# Altium PCB NetworkModule.PcbDoc (part 3 of 3)
Units mm, origin at the board's own origin, x right, y up, seen from the top; angles counter-clockwise.
Board outline 20 x 35 mm, 6 copper layers (Top, GND, Inner3, Inner4, PWR, Bottom), stack 0.74 mm thick; 111 components, 126 nets, 545 pads, 464 vias.
Unrouted connection lines stored in the file: 214.
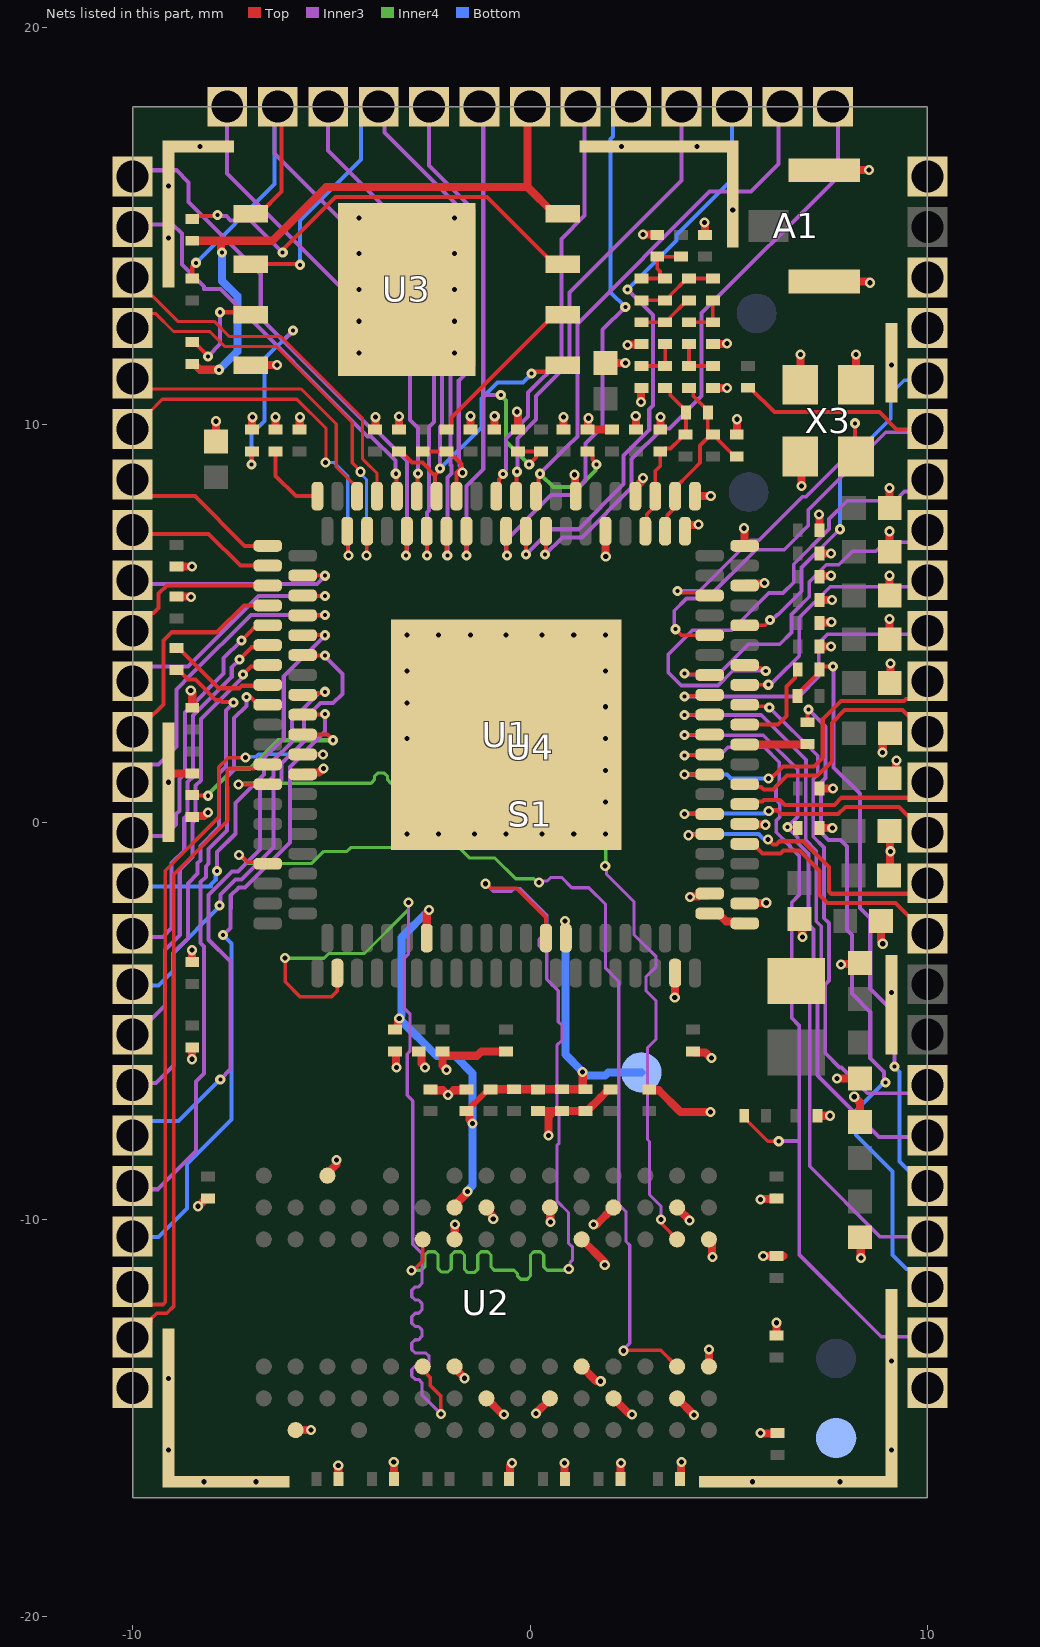
[diagram p7: the nets of this part, all layers, seen from the top]

## Via types
v1: diameter 0.254, hole 0.127, Top to Bottom, tented both sides, 398 vias
v2: diameter 0.254, hole 0.102, Top to Bottom, tented both sides, 66 vias

## Nets (pads, with @x,y where several pads share a name; then routed paths per layer and width w, separated by ;. In a path a pad name is that pad's centre, name@x,y a point inside that pad or via, vN(x,y) a via of type N, cw(c..) or ccw(c..) an arc to the next point about the centre after c; other vN are vias at no path point) (continued)
DDR_RAS: U1.81 U2.K7 | length 22.7
  Top w0.092: v1(-6.162,-3.418) -6.162,-4.021 -5.783,-4.4 -5,-4.4 -4.85,-4.25 U1.81@-4.85,-3.8 ; U2.K7@-2.7,-13.7 -2.7,-13.785 -2.509,-13.976 -2.509,-14.178 -2.251,-14.437 -2.251,-14.883 v1(-2.241,-14.892)
  Inner3 w0.079: v1(-3.062,-2.022) -3.062,-3.323 -3.166,-3.427 -3.166,-4.682 -3.023,-4.825 -3.023,-5.769 -3.09,-5.836 -3.09,-6.877 -2.952,-7.015 -2.952,-10.628 -2.715,-10.864 -2.715,-11.395 -2.721,-11.401 -2.721,-11.506 -2.721,-11.613 -2.805,-11.696 -2.892,-11.696 -2.975,-11.779 -2.975,-11.945 -2.892,-12.029 -2.805,-12.029 -2.721,-12.112 -2.721,-12.278 -2.805,-12.361 -2.892,-12.361 -2.975,-12.445 -2.975,-12.611 -2.892,-12.694 -2.805,-12.694 -2.721,-12.777 -2.721,-12.944 -2.805,-13.027 -2.892,-13.027 -2.975,-13.11 -2.975,-13.276 -2.892,-13.36 -2.622,-13.36 -2.539,-13.443 -2.539,-13.609 -2.622,-13.692 -2.892,-13.692 -2.975,-13.776 -2.975,-13.942 -2.892,-14.025 -2.805,-14.025 -2.721,-14.108 -2.721,-14.148 -2.721,-14.414 -2.243,-14.892 v1(-2.241,-14.892)
  Inner4 w0.078: v1(-6.162,-3.418) -6.151,-3.429 -5.183,-3.429 -5.062,-3.308 -4.164,-3.308 -3.062,-2.206 v1(-3.062,-2.022)
DDR_UDM: U1.64 U2.B3 | length 22.9
  Top w0.092: v1(-7.34,0.94) -7.335,0.945 -6.605,0.945 U1.64@-6.6,0.95 ; v1(3.292,-9.999) 3.323,-10.03 3.323,-10.123 U2.B3@3.7,-10.5
  Inner3 w0.079: v1(1.891,-1.109) 1.925,-1.142 1.925,-1.313 2.611,-1.999 2.611,-2.829 3.172,-3.391 3.172,-3.639 2.918,-3.893 2.918,-4.249 3.172,-4.503 3.172,-5.459 2.955,-5.676 2.955,-7.988 3.005,-8.038 3.005,-9.376 3.292,-9.663 v1(3.292,-9.999)
  Inner4 w0.078: v1(-7.34,0.94) -7.307,0.973 -7.21,0.973 -7.207,0.976 -4.039,0.976 -3.999,0.976 -3.916,1.059 -3.916,1.147 -3.833,1.23 -3.667,1.23 -3.584,1.147 -3.584,1.059 -3.501,0.976 -3.335,0.976 -3.252,1.059 -3.252,1.147 -3.168,1.23 -3.002,1.23 -2.919,1.147 -2.919,1.059 -2.836,0.976 -2.67,0.976 -2.587,1.059 -2.587,1.147 -2.504,1.23 -2.337,1.23 -2.254,1.147 -2.254,1.059 -2.171,0.976 -2.005,0.976 -1.922,1.059 -1.922,1.147 -1.839,1.23 -1.673,1.23 -1.59,1.147 -1.59,1.059 -1.506,0.976 -1.092,0.976 0.218,0.976 1.905,-0.711 1.905,-1.095 v1(1.891,-1.109)
DDR_UDQS: U1.72 U2.B7 | length 24.1
  Top w0.092: v1(-7.325,-0.828) -7.281,-0.828 -7.098,-1.011 -6.639,-1.011 U1.72@-6.6,-1.05 ; v1(2.348,-13.304) 2.36,-13.292 3.292,-13.292 U2.B7@3.7,-13.7
  Inner3 w0.079: v1(0.23,-1.517) 0.263,-1.484 0.43,-1.484 0.518,-1.396 0.796,-1.396 1.054,-1.654 1.481,-1.654 1.902,-2.075 1.902,-3.682 2.234,-4.013 2.234,-9.625 2.414,-9.805 2.414,-10.557 2.508,-10.651 2.508,-13.117 2.348,-13.277 v1(2.348,-13.304)
  Inner4 w0.078: v1(-7.325,-0.828) -7.314,-0.828 -7.101,-1.041 -5.489,-1.041 -5.186,-0.739 -4.604,-0.739 -4.51,-0.645 -1.783,-0.645 -1.52,-0.908 -0.88,-0.908 -0.359,-1.429 0.094,-1.429 0.182,-1.517 v1(0.23,-1.517)
DDR_VREF: C4.1 C5.1 C11.2 C12.1 C13.1 pad.6 R1.1 R2.2 U1.90 U1.104 U2.J2 | length 20.1
  Top w0.152: C4.1@-1.55,-7.275 -1.501,-7.226 -1.501,-7.178 -1.247,-6.924 -1.247,-6.922 -1.031,-6.706 C11.2@-0.965,-6.706
  Top w0.203: C12.1@-3.398,-5.21 -3.391,-5.202 -3.327,-5.202 -3.327,-4.992 -3.291,-4.956 v1(-3.291,-4.942) ; U1.90@-2.6,-2.92 -2.6,-2.287 -2.538,-2.224 v1(-2.538,-2.211) ; U2.J2@-1.9,-9.7 -1.9,-9.645 -1.588,-9.333 -1.588,-9.303 v1(-1.578,-9.293) ; C4.1@-1.6,-7.275 -1.55,-7.275 -1.527,-7.298 -1.527,-7.492 -1.445,-7.574 v1(-1.445,-7.587) ; C11.2@-1,-6.725 R1.1@-0.4,-6.725 R2.2@0.2,-6.725 C13.1@0.8,-6.725 1.327,-6.725 1.327,-6.319 1.315,-6.307 v1(1.315,-6.293) ; v1(0.881,-2.489) 0.891,-2.498 0.891,-2.911 U1.104@0.9,-2.92
  Bottom w0.203: v1@-3.291,-4.929 -3.266,-4.903 -3.266,-4.883 -3.235,-4.852 -3.235,-2.908 v1@-2.547,-2.22 ; v1@-3.28,-4.953 -2.341,-5.893 -1.88,-5.893 -1.445,-6.327 -1.445,-9.149 -1.578,-9.282 v1(-1.578,-9.293) ; v1(0.881,-2.489) 0.889,-2.496 0.889,-5.854 1.315,-6.28 v1(1.315,-6.293) 1.329,-6.293 1.413,-6.377 1.891,-6.377 1.968,-6.3 pad.6@2.8,-6.3
DDR_WE: U1.102 U2.K3 | length 22.3
  Top w0.092: v1(-2.983,-11.283) -2.94,-11.283 -2.807,-11.15 ; -2.806,-11.15 -2.702,-11.047 -2.702,-10.526 U2.K3@-2.692,-10.516 ; v1(-1.122,-1.554) -1.099,-1.554 -0.983,-1.67 -0.335,-1.67 0.4,-2.405 U1.102@0.4,-2.92
  Inner3 w0.079: v1(-1.122,-1.554) -1.113,-1.554 -0.926,-1.741 -0.469,-1.741 -0.407,-1.678 -0.244,-1.678 0.422,-2.344 0.422,-2.413 0.422,-2.785 0.339,-2.868 0.309,-2.868 0.226,-2.952 0.226,-3.118 0.309,-3.201 0.339,-3.201 0.422,-3.284 0.422,-3.683 0.422,-3.953 0.711,-4.242 0.711,-4.512 0.711,-5.026 0.804,-5.119 0.804,-5.491 0.676,-5.619 0.676,-7.201 0.73,-7.255 0.73,-8.083 0.676,-8.137 0.676,-9.532 0.968,-9.824 0.968,-10.599 1.07,-10.701 1.07,-11.017 1.008,-11.08 1.008,-11.216 v1(0.974,-11.249)
  Inner4 w0.078: v1(-2.983,-11.283) -2.978,-11.278 -2.769,-11.278 -2.729,-11.278 -2.646,-11.195 -2.646,-10.897 -2.563,-10.813 -2.397,-10.813 -2.314,-10.897 -2.314,-11.238 -2.231,-11.321 -2.065,-11.321 -1.982,-11.238 -1.982,-10.897 -1.898,-10.813 -1.732,-10.813 -1.649,-10.897 -1.649,-11.256 -1.566,-11.339 -1.4,-11.339 -1.317,-11.256 -1.317,-10.897 -1.234,-10.813 -1.067,-10.813 -0.984,-10.897 -0.984,-11.195 -0.901,-11.278 -0.403,-11.278 -0.32,-11.361 -0.32,-11.421 -0.236,-11.504 -0.07,-11.504 0.013,-11.421 0.013,-10.897 0.096,-10.813 0.262,-10.813 0.345,-10.897 0.345,-11.195 0.428,-11.278 0.508,-11.278 0.945,-11.278 v1(0.974,-11.249)
EPHY_VRT: R23.1 U1.39 | length 1.9
  Top w0.102: R23.1@-6.4,9.325 -6.4,8.711 -5.889,8.2 U1.39@-5.35,8.2
ETH_RN: U1.34 U4.B4 | length 10.5
  Top w0.079: U4.B4@-9.677,12.802 -9.674,12.798 -9.428,12.798 -8.971,12.341 -8.055,12.341 -7.674,11.96 -6.38,11.96 -4.473,10.053 -4.473,9.035 -4.267,8.829 v1(-4.267,8.814) ; v1(-4.115,6.706) -4.107,6.713 -4.107,7.313 U1.34@-4.1,7.32
  Bottom w0.079: v1(-4.267,8.814) -4.267,8.771 -4.115,8.619 v1(-4.115,6.706)
ETH_RP: U1.33 U4.B3 | length 8.8
  Top w0.079: U4.B3@-9.631,13.331 -9.54,13.24 -9.506,13.24 -8.864,12.598 -7.948,12.598 -7.567,12.217 -6.274,12.217 -4.216,10.16 -4.216,9.142 -4.157,9.082 -3.85,8.776 U1.33@-3.85,8.2
ETH_TN: U1.36 U4.B6 | length 9.1
  Top w0.079: U4.B6@-9.601,10.289 -9.251,10.639 -5.866,10.639 -5.134,9.907 -5.134,9.054 v1(-5.145,9.042) ; U1.36@-4.6,7.32 -4.586,7.306 -4.586,6.72 v1(-4.572,6.706)
  Bottom w0.079: v1(-5.145,9.042) -4.922,9.042 -4.586,8.706 -4.586,6.72 v1(-4.572,6.706)
ETH_TP: U1.35 U4.B5 | length 7.2
  Top w0.079: U4.B5@-9.665,10.79 -9.559,10.896 -9.428,10.896 -5.759,10.896 -4.877,10.014 -4.877,8.937 -4.35,8.41 U1.35@-4.35,8.2
GND: A1.2 A1.3 C1.2 C2.2 C3.2 C4.2 C5.2 C6.2 C7.2 C8.2 C9.2 C10.2 C12.2 C13.2 C14.2 C15.2 C16.2 C17.2 C18.2 C19.2 C20.2 C21.2 C22.2 C23.2 C24.2 C25.2 C26.2 C27.2 C28.2 C29.2 C30.2 C31.2 C32.2 C33.2 C34.2 C35.2 C36.2 C37.2 C38.2 C39.2 C40.2 C41.2 C42.2 C43.2 C44.2 C45.2 C46.2 C47.2 C48.2 C49.2 C50.2 C51.1 C52.2 C54.2 C55.2 C58.2 C61.2 C62.2 C63.1 C64.2 C65.2 C66.2 C67.2 C68.2 C69.2 C70.2 C71.2 C72.2 C73.2 L5.2 pad.2 R2.1 R8.1 R15.1 R17.1 R18.1 R19.1 R23.2 R24.2 S1.1 S1.2 S1.3 S1.4 S1.5 S1.6 S1.7 S1.8 S1.9 S1.10 S1.11 U1.1 U1.2 U1.7 U1.10 U1.13 U1.63 U1.115 U1.120 U1.121 U1.128 U1.152 U1.156 U1.157 U2.A3 U2.A7 U2.B2 U2.B8 U2.D2 U2.D8 U2.E3 U2.E7 U2.F2 U2.F8 U2.H2 U2.H8 U2.J3 U2.J7 U2.N1 U2.P9 U3.4 U3.9 U4.B25 U4.C1 U4.C3 U4.C4 U4.C25 X3.1 X3.2 X3.4 | length 56.1
  Top w0.203: v1(-9.1,1) -9.1,1.177 -9.052,1.225 C34.2@-8.5,1.225 ; C14.2@-8.9,5.675 -8.895,5.67 -8.54,5.67 v1(-8.534,5.664) ; C16.2@-8.9,6.425 v1(-8.509,6.426) ; v1(-8.537,3.305) -8.537,3.291 -8.5,3.254 C23.2@-8.5,2.875 ; v1(-8.509,-5.969) -8.505,-5.965 -8.505,-5.679 C3.2@-8.5,-5.675 ; v1(-8.509,-3.226) -8.505,-3.23 -8.505,-3.521 C1.2@-8.5,-3.525 ; R24.2@-8.5,0.125 -8.477,0.148 -8.208,0.148 -8.116,0.24 v1(-8.103,0.24) ; v1(-8.354,-9.668) -8.343,-9.668 -8.15,-9.475 C9.2@-8.1,-9.475 ; C35.2@-7.899,9.576 v1@-7.899,10.058 ; U3.4@-7.024,11.495 v1(-6.364,11.495) ; R17.1@-7,9.875 -6.993,9.883 -6.993,10.178 v1(-6.985,10.185) ; R23.2@-6.4,9.875 v1(-6.401,10.185) ; U2.P9@-5.9,-15.3 v1(-5.514,-15.3) ; v1(-5.791,10.185) -5.796,10.181 -5.796,9.898 C17.2@-5.782,9.885 ; U1.63@-5.72,1.2 -5.674,1.246 -5.309,1.246 -5.213,1.342 v1(-5.2,1.342) ; U2.N1@-5.1,-8.9 -5.1,-8.845 -4.875,-8.62 -4.875,-8.516 v1(-4.865,-8.507) ; C70.2@-4.825,-16.486 v1(-4.825,-16.193) ; C15.2@-3.893,9.875 -3.893,10.178 v1(-3.886,10.185) ; v1(-3.429,-16.104) -3.427,-16.106 C67.2@-3.427,-16.598 ; C12.2@-3.4,-5.775 -3.391,-5.775 -3.368,-5.798 -3.368,-6.162 v1(-3.358,-6.172) ; R18.1@-3.3,9.875 v1(-3.3,10.2) ; C22.2@-2.8,-5.775 -2.75,-5.775 -2.727,-5.798 -2.727,-6.073 -2.642,-6.158 v1(-2.642,-6.172) ; C73.2@-2.5,-6.725 -2.477,-6.748 -2.194,-6.748 -2.083,-6.859 -2.059,-6.859 v1@-2.057,-6.858 ; C20.2@-2.2,-5.8 -2.118,-5.882 -1.331,-5.882 -1.224,-5.775 C10.2@-0.6,-5.775 ; C20.2@-2.2,-5.775 -2.2,-5.793 -2.205,-5.798 -2.205,-6.124 -2.098,-6.231 v1(-2.098,-6.234) ; v1(-2.06,-6.869) -2.046,-6.869 -1.925,-6.748 -1.623,-6.748 C4.2@-1.6,-6.725 ; U2.J7@-1.9,-13.7 -1.9,-13.733 -1.651,-13.982 v1(-1.651,-13.995) ; U2.J3@-1.9,-10.5 -1.895,-10.495 -1.895,-10.137 v1(-1.889,-10.132) ; C19.2@-1.499,9.876 v1@-1.499,10.199 ; U2.H8@-1.1,-14.5 -0.7,-14.9 -0.67,-14.9 v1(-0.66,-14.91) ; U2.H2@-1.1,-9.7 -1.1,-9.755 -0.936,-9.919 -0.936,-9.98 v1(-0.926,-9.99) ; C24.2@-0.9,9.875 -0.894,9.881 -0.894,10.194 v1@-0.9,10.2 ; v1@-0.894,10.205 v1(-0.889,10.211) ; C69.2@-0.516,-16.591 -0.502,-16.577 -0.502,-16.187 -0.457,-16.143 v1(-0.457,-16.129) ; v1(-0.33,10.323) -0.33,10.31 -0.302,10.282 -0.302,9.898 -0.3,9.896 R19.1@-0.3,9.875 ; v1(0.152,-14.884) 0.152,-14.871 0.5,-14.523 U2.F8@0.5,-14.5 ; R2.1@0.25,-7.275 0.594,-7.275 ; v1(0.462,-7.893) 0.462,-7.406 0.594,-7.275 ; U2.F2@0.5,-9.7 0.508,-9.708 0.508,-10.055 v1(0.515,-10.062) ; C43.2@0.838,9.876 v1(0.838,10.185) ; v1(0.864,-16.129) 0.869,-16.135 0.869,-16.58 C68.2@0.882,-16.593 ; v1(1.118,8.738) 1.127,8.728 1.127,8.223 U1.13@1.15,8.2 ; U2.E7@1.3,-13.7 1.662,-14.062 1.768,-14.062 v1(1.778,-14.072) ; U2.E3@1.3,-10.5 1.87,-11.07 1.87,-11.141 v1(1.879,-11.151) ; C5.2@1.4,-7.3 1.412,-7.3 C5.2@1.437,-7.275 ; R15.1@1.405,9.876 C46.2@2.057,9.876 ; R15.1@1.44,9.876 1.463,9.9 1.463,10.15 v1(1.473,10.16) ; C5.2@1.441,-7.275 C5.2@1.437,-7.275 ; v1(1.597,-10.132) 1.606,-10.122 1.678,-10.122 U2.D2@2.1,-9.7 ; U1.10@1.9,7.32 1.903,7.318 1.903,6.683 v1(1.905,6.68) ; C42.2@1.9,11.55 1.902,11.552 2.395,11.552 v1(2.396,11.553) ; C65.2@2.027,-6.725 1.977,-6.725 1.778,-6.924 1.778,-6.934 C5.2@1.437,-7.275 ; U2.D8@2.1,-14.5 2.5,-14.9 2.556,-14.9 v1(2.565,-14.91) ; C8.2@2.281,-16.595 2.281,-16.134 v1(2.286,-16.129) ; v1(2.453,12) 2.453,12.02 2.795,12.02 L5.2@2.8,12.025 ; U1.7@2.65,8.2 2.65,8.412 2.827,8.589 2.827,8.648 v1(2.837,8.657) ; v1@2.659,10.237 2.667,10.23 C47.2@2.667,9.876 ; v1(2.794,10.566) 2.797,10.569 2.797,10.922 C55.2@2.8,10.925 ; v1(2.845,14.783) 2.849,14.779 3.196,14.779 C61.2@3.2,14.775 ; C72.2@3,-6.725 3.023,-6.748 3.239,-6.748 3.788,-7.297 v1(4.542,-7.297) ; C51.1@3.277,9.876 3.278,9.877 3.278,10.186 v1(3.279,10.187) ; v1(3.641,-4.42) 3.646,-4.415 3.646,-3.804 U1.115@3.65,-3.8 ; U2.B8@3.7,-14.5 3.703,-14.5 4.122,-14.919 v1(4.125,-14.919) ; U2.B2@3.734,-9.728 3.734,-9.743 4.009,-10.018 v1(4.009,-10.027) ; C7.2@3.78,-16.595 3.798,-16.577 3.798,-16.129 3.81,-16.117 v1(3.81,-16.104) ; U1.2@3.9,7.32 3.9,7.425 3.948,7.474 4.231,7.474 v1(4.241,7.483) ; v1(4.023,-1.884) 4.032,-1.874 4.234,-1.874 4.262,-1.846 4.474,-1.846 U1.121@4.52,-1.8 ; C64.2@4.1,-5.775 4.123,-5.798 4.413,-5.798 4.553,-5.939 v1(4.567,-5.939) ; U1.1@4.15,8.2 4.152,8.202 4.545,8.202 v1(4.547,8.204) ; v1(4.394,15.088) 4.397,15.085 4.397,14.778 C62.2@4.4,14.775 ; U2.A7@4.5,-13.7 v1(4.5,-13.268) ; U2.A3@4.5,-10.5 4.5,-10.555 4.581,-10.636 4.581,-10.94 v1(4.59,-10.95) ; C54.2@4.6,10.925 4.602,10.924 4.952,10.924 v1(4.953,10.922) ; C58.2@4.6,12.025 4.607,12.032 4.946,12.032 v1(4.953,12.04) ; C52.2@5.127,9.773 5.203,9.773 5.203,10.131 v1(5.207,10.135) ; v1(5.385,7.391) 5.392,7.384 5.392,6.958 U1.156@5.4,6.95 ; U1.120@5.4,-2.05 5.409,-2.041 5.935,-2.041 v1(5.944,-2.032) ; U1.128@5.4,-0.05 5.41,-0.06 5.913,-0.06 v1(5.923,-0.07) ; U1.152@5.4,5.95 5.446,5.996 5.867,5.996 5.884,6.013 v1(5.897,6.013) ; v1(5.8,-15.375) 5.81,-15.385 6.21,-15.385 C2.2@6.225,-15.4 ; v1(5.8,-9.5) 5.81,-9.49 6.127,-9.49 6.146,-9.471 C6.2@6.146,-9.452 ; v1(5.867,-10.922) 5.869,-10.923 6.225,-10.923 6.376,-10.923 6.377,-10.925 ; C71.2@6.2,-12.925 v1(6.2,-12.6) ; C26.2@6.66,-2.423 6.848,-2.611 6.848,-2.886 v1(6.858,-2.896) ; X3.1@6.807,11.107 v1(6.807,11.76) ; v1(6.833,8.458) X3.2@6.833,9.067 ; C50.2@7.235,-7.391 v1(7.544,-7.391) ; v1(7.273,7.738) 7.279,7.731 7.279,7.347 C45.2@7.285,7.341 ; C39.2@7.275,6.725 7.306,6.756 v1(7.569,6.756) ; R8.1@7.285,-0.152 v1(7.605,-0.152) ; C63.1@7.286,0.839 v1@7.621,0.839 ; C18.2@7.285,5.004 7.303,5.022 7.57,5.022 v1(7.58,5.031) ; C41.2@7.291,5.576 7.3,5.585 7.595,5.585 v1(7.598,5.581) ; C37.2@7.296,6.172 7.296,6.175 7.309,6.188 7.559,6.188 v1(7.569,6.198) ; C21.2@7.397,4.42 v1(7.569,4.42) ; A1.2@7.4,13.6 7.402,13.598 8.506,13.598 8.535,13.569 v1(8.549,13.569) ; A1.3@7.4,16.4 7.401,16.401 v1(8.533,16.402) v1(8.533,16.402) ; v1(7.722,-6.452) C30.2@8.203,-6.451 ; v1(7.823,-3.581) 7.833,-3.572 8.102,-3.572 8.2,-3.473 C31.2@8.2,-3.468 ; v1(8.157,-6.913) 8.303,-7.058 8.303,-7.447 C49.2@8.2,-7.55 ; C48.2@8.2,-10.45 8.321,-10.572 8.321,-10.963 v1(8.331,-10.973) ; X3.4@8.204,11.104 v1(8.204,11.76) ; C25.2@8.832,-2.389 8.832,-3.006 8.875,-3.049 v1(8.875,-3.063) ; C27.2@8.847,-1.4 C27.2@8.856,-1.409 ; v1(8.865,1.753) 8.874,1.762 8.874,2.056 C32.2@9.053,2.235 ; C28.2@9.039,-0.229 C28.2@9.04,-0.231 ; C27.2@9.042,-1.372 9.058,-1.356 9.058,-0.746 v1(9.068,-0.737) 9.058,-0.727 9.058,-0.315 C28.2@9.093,-0.279 ; v1(9.042,5.105) 9.046,5.102 9.046,4.604 C40.2@9.05,4.6 C40.2@9.05,4.699 ; v1(9.042,6.198) 9.046,6.194 9.046,5.704 C36.2@9.05,5.7 C36.2@9.05,5.842 ; v1(9.042,7.315) 9.046,7.311 9.046,6.669 9.058,6.657 9.05,6.649 C38.2@9.05,6.807 ; v1(9.042,8.407) 9.046,8.404 9.046,7.904 C44.2@9.05,7.9 ; C29.2@9.05,1.1 9.21,1.26 9.21,1.54 v1(9.22,1.549) ; C33.2@9.05,3.5 9.068,3.518 v1@9.068,3.962 ; 0.594,-7.275 0.803,-7.275 C5.2@1.437,-7.275
  other v1: -8.2,-16.6 -6.9,-16.6 5.6,-16.6 7.8,-16.6 -9.1,-15.8 9.1,-15.8 -9.1,-14 9.093,-13.564 9.093,-4.293 -3.1,-0.3 -2.3,-0.3 -1.4,-0.3 -0.6,-0.3 0.3,-0.3 1.1,-0.3 1.9,-0.3 1.9,0.5 7.621,0.84 1.9,1.3 -3.1,2.1 1.9,2.1 1.9,2.9 -3.1,3 -3.1,3.8 1.9,3.8 9.068,3.988 -3.1,4.7 -2.3,4.7 -1.5,4.7 -0.6,4.7 0.3,4.7 1.1,4.7 1.9,4.7 -7.899,10.084 -1.499,10.211 2.659,10.212 9.1,11.5 -4.3,11.8 -1.9,11.8 -4.3,12.6 -1.9,12.6 -4.3,13.4 -1.9,13.4 -4.3,14.3 -1.9,14.3 -9.1,14.7 -4.3,15.2 -1.9,15.2 5.1,15.4 -9.1,16 -8.3,17 2.3,17 4.2,17
I2C_SCL: U1.20 U4.A5 | length 13.2
  Top w0.102: U1.20@-0.6,7.32 -0.592,7.312 -0.592,6.713 v2(-0.584,6.706)
  Inner3 w0.102: v2(-0.584,6.706) -0.61,6.731 -0.61,7.087 0.533,8.23 1.03,8.23 1.372,8.571 1.372,8.592 1.397,8.618 1.397,9.525 1.829,9.957 1.829,12.386 v2(2.396,12.954)
  Bottom w0.102: U4.A5@2.091,17.551 2.091,17.253 2.021,17.182 2.021,13.33 v2(2.396,12.954)
I2C_SDA: U1.21 U4.A6 | length 10.5
  Top w0.102: U1.21@-0.85,8.2 -0.784,8.266 -0.784,8.615 -0.678,8.722 v2(-0.678,8.756)
  Inner3 w0.102: v2(-0.678,8.756) -0.678,8.798 -0.605,8.87 -0.605,9.653 -0.051,10.208 -0.051,10.803 0.787,11.641 0.787,14.675 1.372,15.259 U4.A6@1.372,17.78
I2S_CLK: U1.19 U4.A4 | length 11.3
  Top w0.102: U1.19@-0.35,8.2 -0.338,8.212 -0.338,8.802 v2(-0.326,8.814)
  Inner3 w0.102: v2(-0.326,8.814) -0.318,8.821 -0.318,9.653 0.152,10.124 0.152,10.719 0.991,11.557 0.991,13.324 3.81,16.143 U4.A4@3.81,17.755
I2S_SDI: U1.16 U4.A1 | length 15.1
  Top w0.102: v2(0.381,6.731) 0.4,6.75 U1.16@0.4,7.32
  Inner3 w0.102: v2(0.381,6.731) 0.813,7.163 1.303,7.163 2.558,8.417 2.558,9.134 3.331,9.907 3.506,9.907 4.318,10.719 4.318,12.804 7.747,16.233 U4.A1@7.747,17.755
I2S_SDO: R15.2 U1.17 U4.A2 | length 14.8
  Top w0.102: U1.17@0.15,8.2 0.216,8.266 0.216,8.684 0.254,8.722 v2(0.254,8.763) ; R15.2@1.448,9.326 1.498,9.326 1.572,9.252 1.572,9.127 1.676,9.023 v2(1.676,8.992)
  Inner3 w0.102: v2(0.254,8.763) 0.923,9.432 1.194,9.703 1.194,12.536 4.519,15.862 5.558,15.862 6.256,16.56 U4.A2@6.256,17.599
  Inner4 w0.102: v2@0.279,8.738 0.584,8.433 1.233,8.433 1.647,8.847 1.647,8.962 v2(1.676,8.992)
I2S_WS: U1.18 U4.A3 | length 14.6
  Top w0.102: v2(-0.102,6.731) -0.1,6.733 U1.18@-0.1,7.32
  Inner3 w0.102: v2(-0.102,6.731) 0.533,7.366 1.219,7.366 2.355,8.501 2.355,9.218 2.999,9.863 2.999,10.376 3.099,10.476 3.099,12.754 v2(2.452,13.4)
  Bottom w0.102: v2(2.452,13.4) 3.683,14.631 3.683,14.772 5.08,16.169 U4.A3@5.08,17.678
IO11: U1.29 U4.A13 | length 11.6
  Top w0.102: U1.29@-2.85,8.2 -2.835,8.215 -2.835,8.753 v2(-2.819,8.768)
  Inner3 w0.102: U4.A13@-7.62,17.755 -7.62,16.315 -3.021,11.716 -3.021,10.118 -2.819,9.917 v2(-2.819,8.768)
IO14: U1.40 U4.B7 | length 3.8
  Top w0.102: U4.B7@-9.779,8.428 -9.551,8.2 -8.429,8.2 -7.179,6.95 U1.40@-6.6,6.95
IO15: U1.42 U4.B8 | length 3.5
  Top w0.102: U4.B8@-9.792,7.252 -8.091,7.252 -7.288,6.45 U1.42@-6.6,6.45
IO16: U1.43 U4.B9 | length 5.2
  Top w0.102: U1.43@-5.72,6.2 -5.159,6.2 v2(-5.156,6.198)
  Inner3 w0.102: U4.B9@-9.703,5.994 -5.359,5.994 v2(-5.156,6.198)
IO17: U1.44 U4.B10 | length 3.7
  Top w0.102: U4.B10@-9.703,5.107 -9.551,5.259 -9.473,5.259 -9.449,5.283 -9.447,5.283 -9.344,5.386 -9.344,5.746 -9.138,5.952 -7.348,5.952 -7.345,5.95 U1.44@-6.6,5.95
IO38: R8.2 U1.137 U4.C22 | length 18.1
  Top w0.092: v2(3.886,2.184) 3.894,2.192 4.512,2.192 U1.137@4.52,2.2 ; v2(6.475,-0.129) v2@6.505,-0.129 ; v2@6.502,-0.127 v2@6.505,-0.129 ; R8.2@6.735,-0.152 R8.2@6.712,-0.129 ; R8.2@6.782,-0.127 6.779,-0.129 R8.2@6.712,-0.129 ; v2@6.505,-0.129 R8.2@6.712,-0.129
  Inner3 w0.092: v2(3.886,2.184) 5.867,2.184 6.739,1.313 6.739,0.14 6.475,-0.125 v2(6.475,-0.129) 6.734,-0.388 6.734,-0.527 7.008,-0.802 7.008,-2.58 7.133,-2.704 7.133,-3.83 7.037,-3.926 7.037,-8.663 8.814,-10.439 9.703,-10.439 U4.C22@9.779,-10.516
IO44: U1.144 U4.C7 | length 12.3
  Top w0.092: U1.144@5.4,3.95 5.468,3.882 5.809,3.882 5.887,3.804 v2(5.931,3.804)
  Inner3 w0.092: v2(5.931,3.804) 5.102,3.804 4.731,3.434 3.805,3.434 3.48,3.759 3.48,4.216 4.089,4.826 5.072,4.826 6.008,5.761 6.367,5.761 6.634,6.029 6.634,6.484 7.523,7.373 7.523,7.625 7.985,8.086 9.186,8.086 9.416,8.316 9.616,8.316 U4.C7@9.8,8.5
JTAG_TCK: U1.140 U4.C19 | length 12.9
  Top w0.092: U1.140@5.4,2.95 5.435,2.915 5.989,2.915 v2(6.02,2.884)
  Inner3 w0.092: v2(6.02,2.884) 7.239,1.665 7.239,1.192 7.127,1.08 7.127,-0.372 7.396,-0.641 7.396,-2.419 7.521,-2.544 7.521,-3.991 7.425,-4.086 7.425,-5.814 7.788,-6.177 7.835,-6.177 8.487,-6.828 9.749,-6.828 U4.C19@9.779,-6.858
JTAG_TDI: U1.142 U4.C9 | length 5.9
  Top w0.092: U1.142@5.4,3.45 5.402,3.452 5.992,3.452 v2(5.994,3.454)
  Inner3 w0.092: v2(5.994,3.454) 6.038,3.454 6.108,3.524 6.115,3.524 6.24,3.649 6.771,4.18 6.771,5.143 7.551,5.923 9.707,5.923 U4.C9@9.728,5.944
JTAG_TDO: U1.143 U4.C8 | length 8.4
  Top w0.092: v2(3.89,3.738) 3.909,3.719 4.501,3.719 U1.143@4.52,3.7
  Inner3 w0.092: v2(3.89,3.738) 3.919,3.708 4.732,3.708 5.499,4.475 6.286,4.475 6.577,4.766 6.577,5.223 7.022,5.668 7.022,6.039 7.455,6.472 7.77,6.472 8.114,6.816 8.7,6.816 8.92,7.036 U4.C8@9.754,7.036
JTAG_TMS: U1.141 U4.C10 | length 7.7
  Top w0.092: v2(3.886,3.159) 3.907,3.179 4.499,3.179 U1.141@4.52,3.2
  Inner3 w0.092: v2(3.886,3.159) 6.766,3.159 7.264,3.658 7.264,4.503 7.485,4.724 9.728,4.724 U4.C10@9.779,4.775
JTAG_TRST: U1.139 U4.C20 | length 15.5
  Top w0.092: v2(3.886,2.692) 3.89,2.696 4.516,2.696 U1.139@4.52,2.7
  Inner3 w0.092: v2(3.886,2.692) 5.817,2.692 6.942,1.567 6.942,1.169 6.933,1.16 6.933,-0.452 7.202,-0.721 7.202,-2.499 7.327,-2.624 7.327,-3.911 7.231,-4.006 7.231,-6.375 8.781,-7.925 U4.C20@9.779,-7.925
LXBK: L1.1 U1.118 U1.119 | length 0.9
  Top w0.203: U1.119@4.52,-2.3 4.732,-2.3 4.936,-2.504 5.298,-2.504 U1.118@5.359,-2.565
PCIE_CKN: U1.132 U4.C12 | length 5.8
  Top w0.104: U1.132@5.415,0.95 5.48,0.885 5.814,0.885 5.881,0.818 6.114,0.818 6.463,1.167 7.237,1.167 7.597,1.526 7.597,2.496 7.917,2.816 9.374,2.816 U4.C12@9.651,2.539
PCIE_CKP: U1.133 U4.C11 | length 7.7
  Top w0.104: v1(3.886,1.194) 3.889,1.197 4.517,1.197 U1.133@4.52,1.2 ; v1(5.997,1.098) 6.038,1.098 6.099,1.159 6.129,1.159 6.367,1.398 7.142,1.398 7.366,1.622 7.366,2.591 7.821,3.046 9.414,3.046 9.459,3.092 U4.C11@9.552,3.092
  Bottom w0.104: v1(3.886,1.194) 4.953,1.194 5.051,1.095 5.994,1.095 v1(5.997,1.098)
PCIE_RXN: U1.130 U4.C13 | length 4.5
  Top w0.104: U1.130@5.4,0.45 5.465,0.515 5.849,0.515 5.891,0.556 6.283,0.556 6.409,0.431 7.658,0.431 7.839,0.612 U4.C13@9.692,0.612
PCIE_RXP: U1.129 U4.C14 | length 6.6
  Top w0.104: v1(3.886,0.203) 3.888,0.202 4.518,0.202 U1.129@4.52,0.2 ; v1(6.007,0.276) 6.026,0.295 6.218,0.295 6.313,0.2 7.754,0.2 7.935,0.381 9.285,0.381 9.552,0.114 U4.C14@9.552,0.098
  Bottom w0.104: v1(3.886,0.203) 3.894,0.211 5.901,0.211 5.966,0.276 v1(6.007,0.276)
PCIE_TXN: U1.126 U4.C16 | length 5.4
  Top w0.104: U1.126@5.4,-0.55 5.61,-0.55 5.854,-0.794 6.3,-0.794 6.379,-0.715 6.775,-0.715 7.288,-1.227 7.288,-1.84 7.484,-2.036 9.196,-2.036 9.552,-2.392 U4.C16@9.552,-2.442
PCIE_TXP: U1.127 U4.C15 | length 7.3
  Top w0.104: v1(3.988,-0.333) 4.004,-0.316 4.504,-0.316 U1.127@4.52,-0.3 ; v1(5.983,-0.442) 5.998,-0.442 6.119,-0.563 6.205,-0.563 6.284,-0.484 6.871,-0.484 7.518,-1.131 7.518,-1.744 7.579,-1.805 U4.C15@9.652,-1.805
  Bottom w0.104: v1(3.988,-0.333) 4.016,-0.305 5.753,-0.305 5.862,-0.414 5.954,-0.414 v1(5.983,-0.442)
PERST_N: R16.1 U1.135 U4.C24 | length 21.7
  Top w0.092: v2(3.886,1.676) 3.898,1.688 4.508,1.688 U1.135@4.52,1.7 ; R16.1@5.389,-7.391 5.389,-7.441 5.98,-8.032 v2(6.257,-8.032)
  Inner3 w0.092: v2(3.886,1.676) 4.775,1.676 4.978,1.88 5.898,1.88 6.272,1.505 6.272,0.984 6.19,0.902 6.19,0.559 6.282,0.467 6.282,0.124 6.198,0.04 6.198,-0.26 6.54,-0.602 6.54,-0.621 6.77,-0.851 6.77,-1.837 6.583,-2.024 6.583,-4.932 6.77,-5.119 6.77,-8.026 6.77,-10.885 8.839,-12.954 U4.C24@9.779,-12.954 ; v2(6.257,-8.032) 6.263,-8.026 6.756,-8.026
PORST_N: R11.2 R13.1 U4.C21 | length 14.7
  Top w0.102: R13.1@6.733,3.225 R11.2@7.262,3.754 ; R11.2@7.309,3.909 7.312,3.912 v2(7.62,3.912)
  Top w0.203: R13.1@6.733,3.175 R13.1@6.733,3.225 ; R11.2@7.285,3.835 7.285,3.885 R11.2@7.309,3.909
  Inner3 w0.102: v2(7.62,3.912) 7.641,3.891 7.641,1.376 8.306,0.711 8.306,-2.165 8.56,-2.419 8.56,-4.191 9.169,-4.801 v2(9.169,-6.147)
  Bottom w0.102: v2@9.169,-6.161 9.297,-6.288 9.297,-8.537 U4.C21@9.551,-8.791
  Bottom w0.203: v2@9.169,-6.161 v2(9.169,-6.147)
PORST_N_1: R11.1 U1.138 | length 2.4
  Top w0.102: U1.138@5.4,2.45 6.235,2.45 6.455,2.671 6.455,3.413 6.661,3.619 6.661,3.761 R11.1@6.735,3.835
PWM0: U1.45 U4.B11 | length 6
  Top w0.102: U1.45@-5.72,5.7 -5.71,5.69 v2(-5.156,5.69)
  Inner3 w0.102: U4.B11@-9.779,3.681 -9.551,3.909 -8.61,3.909 -6.829,5.69 v2(-5.156,5.69)
PWM1: U1.46 U4.B12 | length 5.2
  Top w0.102: U4.B12@-9.652,2.538 -9.227,2.963 -9.227,4.563 -9.015,4.775 -7.874,4.775 -7.199,5.45 U1.46@-6.6,5.45
REF_CLKO: R10.1 U4.C23 | length 16.4
  Top w0.102: R10.1@6.985,2.51 6.985,2.805 v2(7.008,2.827)
  Inner3 w0.102: v2(7.008,2.827) 7.438,2.397 7.438,1.11 7.326,0.998 7.326,-0.268 7.515,-0.457 7.812,-0.457 7.976,-0.621 7.976,-2.718 8.103,-2.845 8.103,-4.318 8.56,-4.775 8.56,-5.932 8.912,-6.284 8.912,-6.524 v2(8.941,-6.553)
  Bottom w0.102: v2(8.941,-6.553) 8.912,-6.553 8.204,-7.261 8.204,-7.881 9.119,-8.795 9.119,-10.899 9.471,-11.251 U4.C23@9.574,-11.251
REF_CLKO_1: R10.2 U1.136 | length 1.6
  Top w0.203: U1.136@5.4,1.95 5.405,1.955 R10.2@6.984,1.955
RF_DIFF+: C56.1 C59.2 L5.1 | length 1.5
  Top w0.092: L5.1@2.794,12.548 2.821,12.575 C56.1@3.353,12.575 ; C56.1@3.353,12.624 3.499,12.624 3.529,12.654 3.529,12.704 3.95,13.125 C59.2@4,13.125
RF_DIFF-: C57.1 C58.1 L4.1 | length 1.2
  Top w0.092: C57.1@4,12.575 C58.1@4.6,12.575 C58.1@4.623,12.598 ; C58.1@4.597,12.598 4.6,12.601 L4.1@4.6,13.125
RF_HP+: C55.1 C56.2 L2.2 | length 1.2
  Top w0.092: C55.1@2.794,11.43 2.839,11.475 L2.2@3.4,11.475 3.4,12.011 C56.2@3.404,12.014
RF_HP-: C54.1 C57.2 L3.2 | length 1.2
  Top w0.092: C57.2@4.013,12.04 4,12.026 C57.2@4,12.025 L3.2@4,11.475 C54.1@4.6,11.475 4.603,11.475 C54.1@4.623,11.455
RF_LP: C60.1 C61.1 L6.2 L7.1 | length 1.9
  Top w0.092: C60.1@2.794,13.64 2.829,13.675 L6.2@3.4,13.675 3.35,13.675 3.271,13.754 3.271,13.854 3.2,13.925 C61.1@3.2,14.225 3.25,14.225 L7.1@3.8,14.225
RF_LP+: C51.2 C53.1 L2.1 R9.1 U1.5 U1.6 | length 4.2
  Top w0.092: U1.6@2.9,7.32 2.936,7.356 2.936,7.744 U1.5@3.15,7.958 ; U1.5@3.15,8.2 3.15,8.832 3.272,8.954 3.272,9.292 C51.2@3.305,9.325 ; C51.2@3.3,9.325 3.374,9.399 3.537,9.399 3.783,9.645 3.783,9.67 3.813,9.7 3.925,9.7 C53.1@3.925,10.3 ; L2.1@3.404,10.922 3.453,10.922 3.529,10.846 3.529,10.746 3.925,10.35 C53.1@3.925,10.3 C53.1@3.937,10.312
RF_LP-: C52.1 C53.2 L3.1 R12.1 U1.3 U1.4 | length 5.3
  Top w0.092: U1.4@3.4,7.32 3.456,7.376 3.456,7.723 3.582,7.85 3.582,8.342 4.092,8.852 4.277,9.037 4.277,9.476 4.529,9.728 4.671,9.728 4.729,9.67 4.729,9.62 5.15,9.199 C52.1@5.2,9.199 ; L3.1@4,10.925 4.027,10.925 4.106,10.846 4.106,10.719 4.475,10.35 C53.2@4.475,10.305 ; C53.2@4.47,10.312 4.47,10.255 C53.2@4.505,10.22 ; R12.1@4.535,9.768 4.475,9.828 4.475,10.19 C53.2@4.547,10.262
RF_NOTCH: C59.1 C60.2 L4.2 L6.1 | length 2.1
  Top w0.092: C60.2@2.794,13.106 2.813,13.125 L6.1@3.4,13.125 ; L6.1@3.404,13.106 3.431,13.106 3.529,13.204 3.529,13.254 3.95,13.675 C59.1@4,13.675 L4.2@4.6,13.675 4.638,13.675 L4.2@4.648,13.665
RXD0: U1.31 U4.B2 | length 10.2
  Top w0.102: v2(-3.378,8.763) -3.364,8.749 -3.364,8.214 U1.31@-3.35,8.2
  Inner3 w0.102: U4.B2@-9.677,15.037 -8.992,15.037 -8.763,14.808 -8.763,14.032 -8.206,13.475 -8.206,13.411 -7.794,13.411 -4.086,9.703 -3.999,9.703 -3.389,9.093 -3.389,8.774 v2(-3.378,8.763)
RXD1: U1.148 U4.C5 | length 8.5
  Top w0.092: U1.148@5.4,4.95 5.915,4.95 6.041,5.076 v2(6.041,5.085)
  Inner3 w0.092: v2(6.041,5.085) 6.085,5.085 6.211,5.212 6.235,5.212 6.828,5.805 6.828,6.404 7.755,7.33 7.833,7.33 v2(7.798,7.366)
  Bottom w0.092: v2(7.798,7.366) 7.798,8.878 9.074,10.154 9.074,10.776 9.416,11.117 U4.C5@9.67,11.117
RXD2: U1.48 U4.B14 | length 7.1
  Top w0.102: v2(-7.264,4.572) -6.952,4.884 -6.666,4.884 U1.48@-6.6,4.95
  Inner3 w0.102: U4.B14@-9.754,-0.356 -9.195,-0.356 -8.904,-0.065 -8.904,0.196 -8.821,0.279 -8.821,1.085 -8.687,1.219 -8.687,2.76 -7.709,3.737 -7.709,4.127 v2(-7.264,4.572)
SD_CD: U1.50 U4.B16 | length 9.1
  Top w0.102: v2(-7.315,4.089) -7.008,4.397 -6.653,4.397 U1.50@-6.6,4.45
  Inner3 w0.102: U4.B16@-9.703,-2.89 -9.24,-2.89 -9.017,-2.667 -9.017,-1.033 -8.701,-0.717 -8.701,0.101 -8.617,0.184 -8.617,1.001 -8.484,1.135 -8.484,2.676 -7.506,3.653 -7.506,3.885 -7.315,4.076 v2(-7.315,4.089)
SD_CLK: R22.1 U4.B19 | length 12.5
  Top w0.102: R22.1@-8.9,3.825 -8.85,3.825 -8.609,3.584 -8.421,3.584 -7.911,3.073 -7.795,3.073 -7.745,3.023 -7.476,3.023 v2(-7.465,3.012)
  Inner3 w0.102: U4.B19@-9.745,-6.562 -9.407,-6.562 -8.966,-6.121 -8.966,-3.288 -8.611,-2.932 -8.611,-1.544 -8.362,-1.296 -8.362,-1.031 -8.294,-0.964 -8.294,-0.598 -7.823,-0.127 -7.823,1.22 -7.652,1.391 -7.652,2.804 -7.465,2.991 v2(-7.465,3.012)
SD_CLK_1: R22.2 U1.54 | length 2.7
  Top w0.102: R22.2@-8.839,4.369 -8.839,4.364 -7.841,3.366 -7.316,3.366 -7.253,3.429 -6.621,3.429 U1.54@-6.6,3.45
SD_CMD: U1.55 U4.B20 | length 14.3
  Top w0.102: U1.55@-5.72,3.2 -5.673,3.247 -5.185,3.247 v2(-5.156,3.277)
  Inner3 w0.102: v2(-7.794,-6.478) -7.794,-6.473 -7.532,-6.212 -7.532,-3.848 -7.54,-3.841 -7.54,-3.512 -8.09,-2.962 -8.09,-1.837 -7.498,-1.245 -7.346,-1.245 -6.794,-0.693 -6.794,0.804 -6.452,1.146 -6.452,1.557 -5.994,2.014 -5.994,2.562 -5.309,3.247 -5.185,3.247 v2(-5.156,3.277)
  Bottom w0.102: U4.B20@-9.551,-7.521 -8.842,-7.521 -7.799,-6.478 v2(-7.794,-6.478)
SD_D0: U1.52 U4.B18 | length 10.5
  Top w0.102: v2@-7.224,3.706 -7.021,3.91 -6.64,3.91 U1.52@-6.6,3.95
  Inner3 w0.102: U4.B18@-9.651,-5.081 -9.182,-4.612 -9.182,-3.217 -8.814,-2.848 -8.814,-1.196 -8.498,-0.88 -8.498,-0.023 -8.414,0.06 -8.414,0.917 -8.28,1.051 -8.28,2.592 -7.227,3.645 v2(-7.227,3.708)
SD_D1: U1.51 U4.B17 | length 11.6
  Top w0.102: U1.51@-5.72,4.2 -5.716,4.196 -5.161,4.196 v2(-5.156,4.191)
  Inner3 w0.102: v2(-7.81,-2.104) -7.791,-2.084 -7.791,-1.825 -7.413,-1.448 -7.262,-1.448 -6.459,-0.645 -6.459,0.852 -6.248,1.062 -6.248,1.472 -5.69,2.031 -5.69,2.58 -5.272,2.997 -4.953,2.997 -4.724,3.226 -4.724,3.73 -5.156,4.162 v2(-5.156,4.191)
  Bottom w0.102: U4.B17@-9.677,-4.115 -9.348,-4.115 -8.986,-3.753 -8.986,-3.308 -7.81,-2.132 v2(-7.81,-2.104)
SD_D2: U1.57 U4.B22 | length 16.1
  Top w0.102: U1.57@-5.72,2.7 -5.174,2.7 v2(-5.156,2.718)
  Inner3 w0.102: v2(-7.722,-2.845) -7.54,-2.663 -7.54,-2.184 -7.531,-2.175 -7.531,-1.853 -7.329,-1.651 -7.178,-1.651 -6.045,-0.519 -6.045,1.388 -5.156,2.277 v2(-5.156,2.718)
  Bottom w0.102: U4.B22@-9.703,-10.439 -9.348,-10.439 -8.633,-9.725 -8.633,-8.601 -7.515,-7.482 -7.515,-3.052 v2(-7.722,-2.845)
SD_D3: U1.56 U4.B21 | length 14.3
  Top w0.102: v2(-7.137,3.15) -7.039,3.15 -6.839,2.95 U1.56@-6.6,2.95
  Inner3 w0.102: U4.B21@-9.703,-9.24 -9.367,-9.24 -8.407,-8.28 -8.407,-6.533 -8.204,-6.33 -8.204,-3.135 -8.293,-3.047 -8.293,-1.514 -8.159,-1.38 -8.159,-1.115 -8.091,-1.048 -8.091,-0.682 -7.62,-0.211 -7.62,1.136 -7.444,1.313 -7.444,2.615 -7.137,2.921 v2(-7.137,3.15)
SD_WP: U1.49 U4.B15 | length 9.7
  Top w0.102: U1.49@-5.72,4.7 v2(-5.156,4.699) v2(-5.156,4.699)
  Inner3 w0.102: v2(-7.879,-1.231) -7.879,-0.758 -7.417,-0.295 -7.417,0.477 -7.189,0.705 -7.18,0.705 -6.689,1.196 -6.689,1.607 -6.198,2.098 -6.198,3.658 v2(-5.156,4.699)
  Bottom w0.102: U4.B15@-9.652,-1.626 -8.034,-1.626 -8.034,-1.579 -7.909,-1.453 -7.909,-1.26 v2(-7.879,-1.231)
SPI_CLK: R4.1 R21.2 U1.25 U4.A9 | length 11.7
  Top w0.102: R21.2@-2.718,9.322 -2.715,9.325 R4.1@-2.1,9.325 ; R4.1@-2.108,9.322 -2.047,9.322 -1.731,9.006 -1.731,8.912 v1@-1.778,8.865 ; U1.25@-1.85,8.2 -1.85,8.793 v1@-1.778,8.865 ; v1(-1.702,8.788) v1@-1.778,8.865
  Inner3 w0.102: U4.A9@-2.54,17.755 -2.54,16.522 -1.417,15.4 -1.417,11.486 -1.794,11.11 -1.794,9.119 -1.778,9.103 -1.778,8.975 -1.731,8.928 -1.731,8.818 v1(-1.702,8.788)
SPI_CLK_1: R4.2 U3.6 | length 4.2
  Top w0.102: R4.2@-2.1,9.875 -2.05,9.875 -1.976,9.949 -1.976,10.181 0.569,12.725 U3.6@0.813,12.725
SPI_CS0: R5.1 U1.28 U3.1 U4.A12 | length 21.7
  Top w0.102: v2(-8.407,14.072) -8.5,13.979 R5.1@-8.5,13.675 -8.45,13.675 R5.1@-8.376,13.749 ; U3.1@-7.405,15.14 -7.28,15.265 U3.1@-7.112,15.265 ; U3.1@-6.808,15.305 -6.248,15.865 U4.A12@-6.248,17.78 ; U1.28@-2.6,7.32 -2.595,7.315 -2.595,6.71 v2(-2.591,6.706)
  Top w0.203: U3.1@-7.024,15.305 U3.1@-6.808,15.305
  Inner3 w0.102: U4.A12@-6.426,17.78 -6.426,16.821 -2.413,12.808 -2.413,10.07 -2.54,9.943 -2.54,8.884 -2.54,7.841 -2.591,7.79 v2(-2.591,6.706)
  Bottom w0.102: v2(-8.407,14.072) -6.426,16.053 U4.A12@-6.426,17.653
SPI_CS1: R19.2 R20.2 U1.24 U4.A8 | length 15.3
  Top w0.102: v2(-1.6,6.706) U1.24@-1.6,7.32 ; R19.2@-0.276,9.326 R20.2@0.279,9.326 ; v2(-0.021,8.996) 0.155,9.172 0.155,9.252 R20.2@0.229,9.326
  Inner3 w0.102: v2(-1.6,6.706) -1.6,8.458 -1.177,8.881 -1.177,10.744 ; U4.A8@-1.177,17.738 -1.177,10.744 ; v2(-0.737,10.744) -1.177,10.744
  Inner4 w0.102: v2(-0.737,10.744) -0.737,10.735 -0.61,10.608 -0.61,9.576 -0.03,8.996 v2(-0.021,8.996)
SPI_MISO: U1.26 U3.2 U4.A10 | length 18.3
  Top w0.102: U3.2@-7.024,14.035 -5.805,14.035 v2(-5.791,14.021) ; U1.26@-2.1,7.32 -2.1,6.723 v2(-2.083,6.706)
  Inner3 w0.102: U4.A10@-3.658,17.704 -3.658,17.353 -1.621,15.316 -1.621,11.613 -1.997,11.237 -1.997,8.983 -1.981,8.968 -1.981,8.775 -2.083,8.673 v2(-2.083,6.706)
  Bottom w0.102: v2(-5.791,14.021) -5.791,15.136 -4.259,16.668 U4.A10@-4.259,17.743
SPI_MOSI: R18.2 U1.27 U3.5 U4.A11 | length 16.7
  Top w0.102: R18.2@-3.323,9.398 -2.973,9.048 -2.704,9.048 -2.54,8.884 -2.54,8.859 -2.4,8.719 ; U1.27@-2.35,8.2 -2.394,8.244 -2.394,8.712 -2.4,8.719 ; v2(-2.261,8.891) -2.261,8.858 -2.4,8.719 ; v2(0.04,11.289) 0.081,11.289 0.122,11.33 0.659,11.33 U3.5@0.824,11.495
  Inner3 w0.102: U4.A11@-5.08,17.78 -5.08,16.891 -2.21,14.021 -2.21,9.986 -2.261,9.935 v2(-2.261,8.891)
  Bottom w0.102: v2(-2.261,8.891) -1.219,9.932 -1.219,10.657 -0.822,11.054 -0.173,11.054 0.04,11.267 v2(0.04,11.289)
SPIFLASH_NRESET: R7.1 U3.7 | length 11.1
  Top w0.102: R7.1@-8.477,15.157 -8.39,15.243 -7.896,15.243 v2(-7.867,15.272) ; v2(-6.223,14.326) -6.223,14.391 -4.89,15.724 -1.31,15.724 -1.308,15.723 -1.079,15.723 0.608,14.035 U3.7@0.824,14.035
  Inner3 w0.102: v2(-7.867,15.272) -7.838,15.243 -7.642,15.243 -7.537,15.138 -7.036,15.138 v2(-6.223,14.326)
SPIFLASH_NWP: R6.1 U3.3 | length 2.7
  Top w0.102: R6.1@-8.534,12.116 -8.491,12.116 -8.106,11.731 v2(-8.106,11.716) ; v2(-7.798,12.827) -7.086,12.827 U3.3@-7.024,12.765 ; U3.3@-7.229,12.776 U3.3@-7.137,12.776
  Inner3 w0.102: v2(-8.106,11.716) -7.798,12.024 v2(-7.798,12.827)
TXD0: R17.2 U1.30 U4.B1 | length 18.1
  Top w0.102: v2(-7.01,8.992) -7,9.002 R17.2@-7,9.325 ; v2(-3.124,6.706) -3.112,6.718 -3.112,7.308 U1.30@-3.1,7.32
  Inner3 w0.102: U4.B1@-9.7,16.4 -8.9,16.4 -8.595,16.095 -8.595,15.605 -6.776,13.787 -6.776,12.68 -4.002,9.906 -3.915,9.906 -3.099,9.09 -3.099,6.731 v2(-3.124,6.706) ; -6.198,12.116 -5.969,12.344 v2(-5.969,12.37)
  Bottom w0.102: v2(-7.01,8.992) -7.01,9.765 -6.68,10.095 -6.68,11.659 v2(-5.969,12.37)
TXD1: R14.1 U1.147 U4.C6 | length 14.2
  Top w0.092: v2(3.658,4.851) 3.809,4.7 U1.147@4.52,4.7
  Top w0.102: R14.1@5.486,10.926 5.536,10.926 6.15,10.312 8.793,10.312 9.225,9.881 U4.C6@9.677,9.881
  Inner3 w0.092: v2(3.658,4.851) 3.627,4.882 3.627,5.085 3.625,5.086 3.625,5.314 3.934,5.623 4.454,5.623 5.685,6.853 6.393,6.853 6.998,7.458 6.998,7.852 8.951,9.804 U4.C6@9.754,9.804
TXD2: U1.47 U4.B13 | length 7.4
  Top w0.102: U1.47@-5.72,5.2 -5.163,5.2 v2(-5.156,5.207)
  Inner3 w0.102: U4.B13@-9.551,1.449 -9.351,1.449 -8.9,1.9 -8.9,3.337 -8.531,3.706 -8.526,3.706 -7.025,5.207 v2(-5.156,5.207)
USB_D+: U1.61 U4.B23 | length 17.7
  Top w0.091: U4.B23@-9.546,-12.14 -9.233,-12.14 -9.18,-12.086 -9.18,-1.225 -7.828,0.126 -7.828,0.799 -7.833,0.804 -7.833,1.382 -7.596,1.62 v1(-7.164,1.62)
  Top w0.092: U1.61@-5.72,1.7 -5.719,1.699 -5.209,1.699 v1(-5.207,1.698)
  Bottom w0.092: v1(-7.164,1.62) -7.146,1.638 -6.9,1.638 -6.83,1.708 -5.218,1.708 v1(-5.207,1.698)
USB_D-: U1.62 U4.B24 | length 15.9
  Top w0.091: U4.B24@-9.546,-12.596 -9.546,-12.516 -9.537,-12.507 -9.537,-12.5 -9.396,-12.358 -9.143,-12.358 -8.961,-12.176 -8.961,-1.316 -7.61,0.036 -7.61,0.89 -7.614,0.895 -7.614,1.292 -7.561,1.345 -6.947,1.345 -6.843,1.449 U1.62@-6.601,1.449
USB_VRT: R24.1 U1.59 | length 5
  Top w0.102: R24.1@-8.478,0.68 -8.465,0.668 -8.11,0.668 v2(-8.103,0.66) ; U1.59@-5.72,2.2 -5.096,2.2 v2(-4.953,2.057)
  Inner4 w0.102: v2(-8.103,0.66) -8.103,0.69 -7.452,1.34 -7.049,1.34 -6.332,2.057 v2(-4.953,2.057)
VDD_FLASH: R6.2 R7.2 U3.8 U4.A7 | length 16.2
  Top w0.203: R6.2@-8.509,11.532 -8.457,11.532 -8.304,11.379 v2(-7.823,11.379) ; R7.2@-8.5,14.625 -7.772,14.625 ; v2(-7.747,14.326) -7.772,14.351 -7.772,14.625 ; U4.A7@-0.076,17.704 -0.063,17.691 -0.063,15.977 ; U3.8@0.824,15.305 0.608,15.305 -0.063,15.977 ; -7.772,14.625 -6.482,14.625 -5.129,15.978 -1.204,15.978 -1.203,15.977 -0.063,15.977
  Bottom w0.203: v2(-7.823,11.379) -7.366,11.836 -7.366,13.233 -7.747,13.614 v2(-7.747,14.326)
XTALIN: U1.151 X3.3 | length 8.4
  Top w0.092: v2(3.708,5.817) 3.752,5.817 3.801,5.768 4.452,5.768 U1.151@4.52,5.7 ; X3.3@8.179,9.093 v2(8.179,10.033)
  Inner3 w0.092: v2(3.708,5.817) 4.267,5.817 5.542,7.091 5.763,7.091 6.855,8.183 6.946,8.183 8.179,9.416 v2(8.179,10.033)
pads on no net: U1.9 U1.11 U1.12 U1.37 U2.A2 U2.A8 U2.E2 U2.E8 U2.R3 U2.R7

## Polygon pours and split planes (outlines as drawn)
GND on Top "GND_L01_P006" (solid, pour order 6): -10,18.2 10,18.2 10,-17 -10,-17
LXBK on Top "Top-LXBK" (solid, remove dead copper, pour order 5): 4.928,-2.337 4.928,-2.978 5.461,-2.978 5.461,-4.738 7.425,-4.738 7.425,-3.279 6.401,-3.279 6.401,-2.337
1V2 on Top "Top-1V2" (solid, remove dead copper, pour order 4): 4.95,-4.873 4.95,-6.652 7.299,-6.652 7.299,-5.997 9.097,-5.997 9.097,-3.994 7.525,-3.994 7.525,-4.873
GND on Bottom "GND_L06_P003" (solid, pour order 3): -10,18.2 10,18.2 10,-17 -10,-17
1V2 on Bottom "1V2_L06_P002" (solid, pour order 2): -8.204,3.353 -4.699,3.353 -4.699,6.299 -1.3,6.299 -1.3,9.5 -0.4,9.5 -0.4,6.299 3.632,6.299 3.632,4.394 6.8,4.394 6.8,2.362 4.089,2.362 4.089,1 6.9,1 6.9,0.3 3.886,0.3 3.886,-1.524 6.147,-1.524 6.147,-3.4 9,-3.4 9,-6.9 4.8,-6.9 4.8,-2.972 2.4,-2.972 -1.6,-2.972 -1.6,-4.5 -3.1,-4.5 -3.1,-2.972 -5.639,-2.972 -5.639,2.1 -8.204,2.1
3V3 on PWR (split plane): 9.744,-16.744 7.829,-16.744 7.829,-8.1 7.82,-8.05 7.792,-8.008 7.75,-7.98 7.7,-7.971 5.929,-7.971 5.929,-4.039 5.92,-3.989 5.892,-3.947 5.85,-3.919 5.8,-3.909 5.209,-3.909 5.209,-1.45 7.95,-1.45 8,-1.44 8.042,-1.412 8.07,-1.37 8.08,-1.321 8.08,-0.432 8.07,-0.382 8.042,-0.34 8,-0.312 7.95,-0.302 5.209,-0.302 5.209,1.448 5.2,1.497 5.172,1.539 5.13,1.567 5.08,1.577 -9.744,1.577 -9.744,17.744 9.744,17.744
1V8 on PWR (split plane): 4.951,-0.432 4.96,-0.481 4.988,-0.523 5.03,-0.551 5.08,-0.561 7.821,-0.561 7.821,-1.191 5.08,-1.191 5.03,-1.201 4.988,-1.229 4.96,-1.271 4.951,-1.321 4.951,-4.039 4.96,-4.088 4.988,-4.13 5.03,-4.158 5.08,-4.168 5.671,-4.168 5.671,-8.1 5.68,-8.15 5.708,-8.192 5.75,-8.22 5.8,-8.229 7.571,-8.229 7.571,-16.744 -9.744,-16.744 -9.744,1.318 4.951,1.318
GND on GND (split plane): 9.744,-16.744 -9.744,-16.744 -9.744,17.744 9.744,17.744

## Other copper
Bottom:
  rectangle net GND: -3.6,-0.8 2.4,5.2
PWR (plane layer: these items are gaps in the copper):
  lines w0.254: 6.456,-17 -10,-17 ; -10,-17 -10,1.448 5.08,1.448 5.08,-0.432 7.95,-0.432 7.95,-1.321 5.08,-1.321 5.08,-4.039 5.8,-4.039 5.8,-8.1 7.7,-8.1 7.7,-17 -10,-17

## Silkscreen, mask and mechanical layers (free items; w line width, h text height)
Silkscreen Top:
  text "NW0101 Rev.A" at 7.513,-15.972 h0.51 r90
Solder Mask Bottom:
  region: 2.413,5.207 2.413,-0.864 2.362,-0.813 -3.607,-0.813 -3.607,5.207
Shield Drawing:
  lines w0.254: 5.1,17 5.1,12.55 9.1,12.55 9.1,-16.6 -9.1,-16.6 -9.1,17 5.107,17
Drill Drawing:
  lines w0.025: -5.1,0 -5.099,0 ; 0,-7.5 0.001,-7.5 ; 0.6,3.1 0.601,3.1 ; 0,7.5 0.001,7.5 0,7.5 ; 5.1,0 5.101,0

## Dimensions
10.98,14.446 to 11.378,12.55 on Shield Drawing
9.371,10.551 to 9.273,-3.353 on Shield Drawing
-9.1,-14.75 to 9.1,-14.25 on Shield Drawing
9.1,11.55 to -9.1,15.3 on Shield Drawing
5.1,15.8 to 9.1,11.55 on Shield Drawing
1.253,17.226 to 5.1,15.8 on Shield Drawing
1.25,17.227 to -7.452,17.236 on Shield Drawing
-9.1,15.3 to -7.452,17.231 on Shield Drawing
-6.055,-16.06 to 4.242,-16.203 on Shield Drawing
4.254,-16.201 to 9.1,-14.25 on Shield Drawing
-9.1,-14.75 to -6.054,-16.057 on Shield Drawing
9.26,-3.352 to 9.313,-5.848 on Shield Drawing
-9.401,-0.498 to -9.258,-12.75 on Shield Drawing
-9.258,-12.751 to -7.65,-16.6 on Shield Drawing
3.25,17 to 6.286,14.447 on Shield Drawing
9.371,10.552 to -10,18.2 on Shield Drawing
9.285,-11.754 to 9.313,-5.849 on Shield Drawing
6.75,-16.6 to 9.284,-11.754 on Shield Drawing
-9.406,-0.502 to -9.356,2.502 on Shield Drawing
-9.386,13.452 to -9.352,2.5 on Shield Drawing
-8.35,17 to -9.331,13.453 on Shield Drawing
3.25,17 to 6.75,-16.6 on Shield Drawing
-8.35,17 to -7.65,-16.6 on Shield Drawing
-0.6,2.2 to -10,-17 on Drill Drawing
10,18 to 7.62,18 on Drill Drawing
-1.27,18 to 0,18 on Drill Drawing
-10,18 to -7.62,18 on Drill Drawing
-10,-7.89 to -10,-6.62 on Drill Drawing
-10,18 to -10,16.24 on Drill Drawing
-10,-17 to -10,-14.24 on Drill Drawing
-0.6,2.2 to -10,-17 on Drill Drawing
-10,18 to 10,18 on Drill Drawing
10,18 to 10,-17 on Drill Drawing